# EAGLE board display (EAGLE 7.4.0)
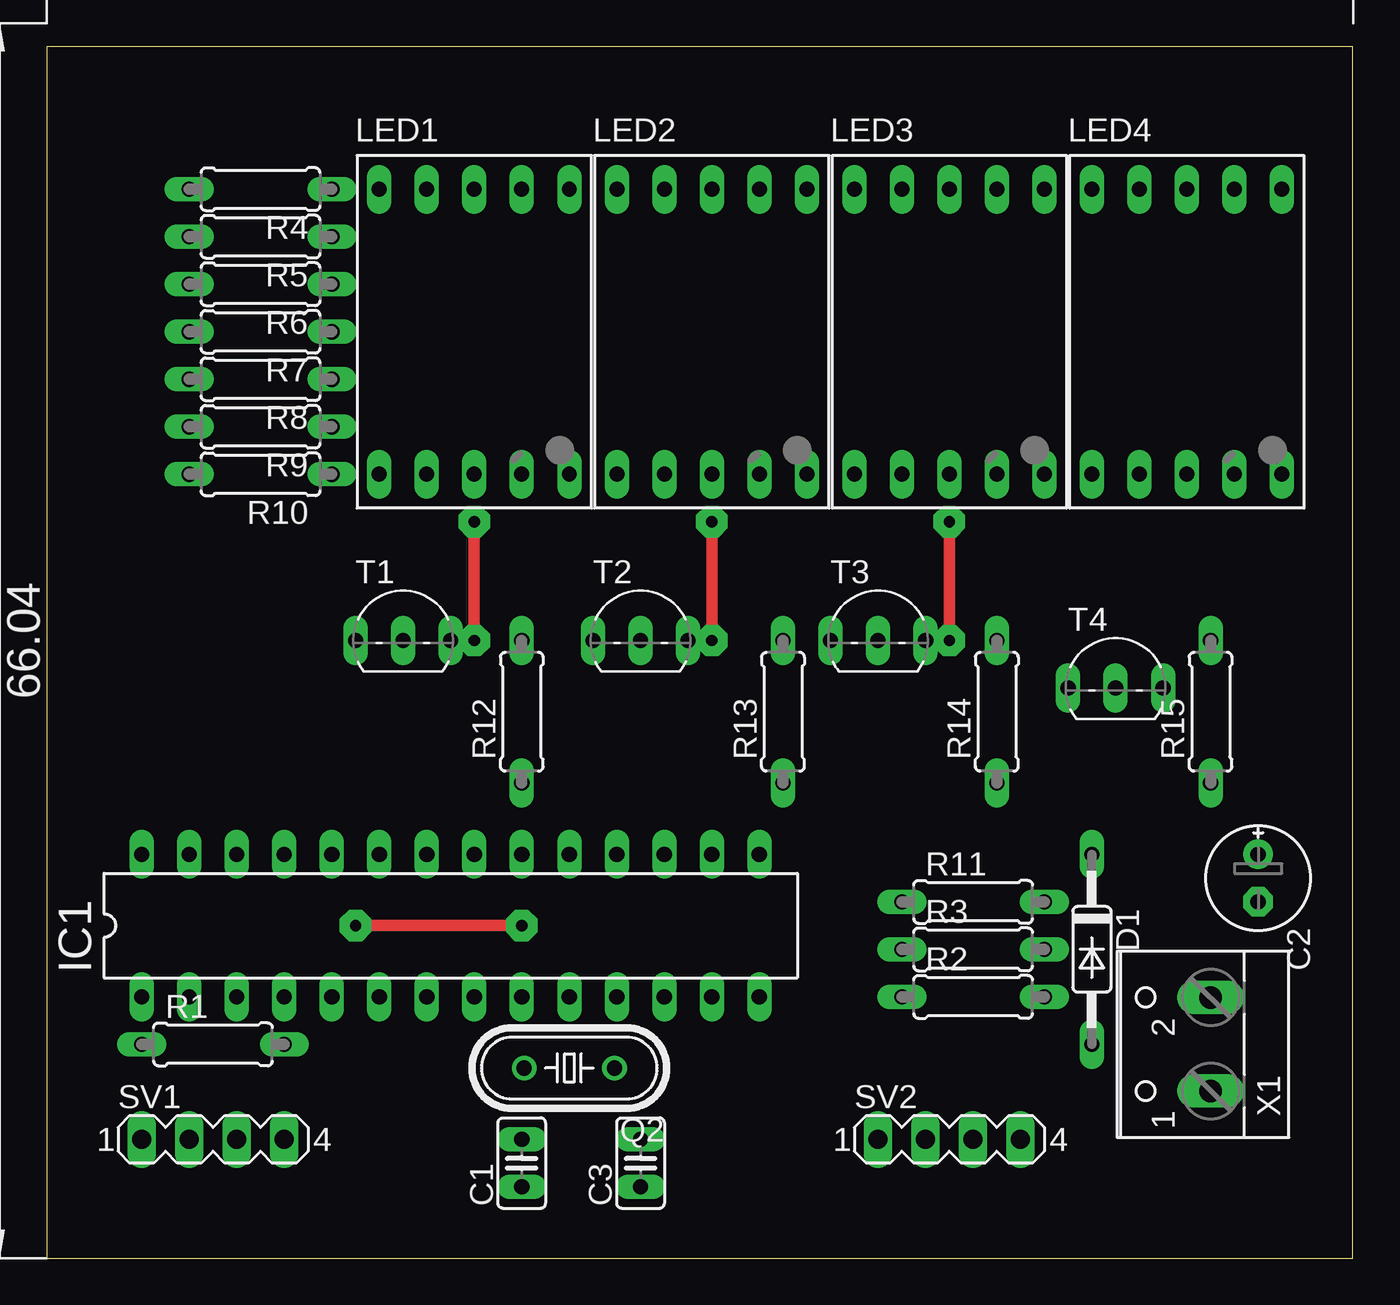
[diagram p0: board, top side]
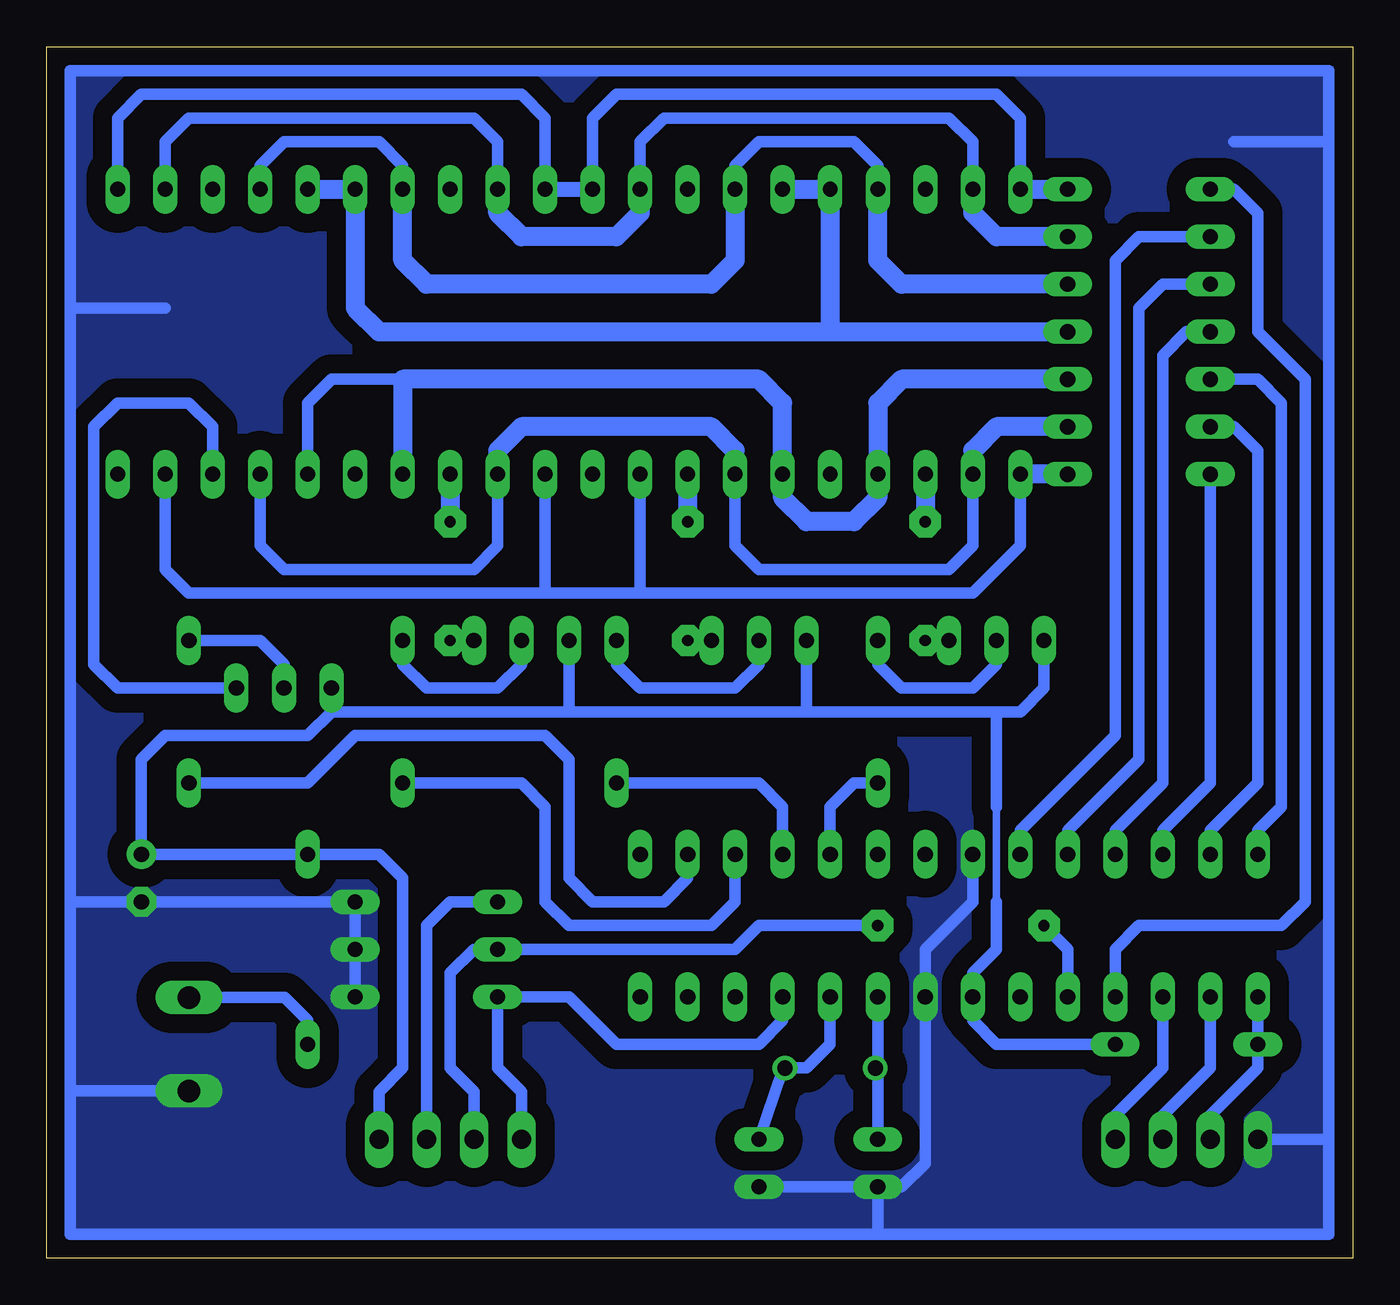
[diagram p1: board, bottom side, seen from below]

Size 69.83 x 64.77 mm. Coordinates in mm from the lower left corner, seen from the top.
Outline: 0,0 69.83,0 69.83,64.77 0,64.77 0,0
Copper layers (1*16): Top 0.035mm / dielectric 1.5mm / Bottom 0.035mm
Design rules "default": minimum track width 10mil, minimum drill 24mil, track to track 8mil, track to pad 8mil, pad to pad 8mil, via to via 8mil, smd to smd 8mil, copper to edge 40mil, drill to drill 8mil, minimum pad ring 10mil, minimum via ring 8mil, stop-mask expansion 4mil, vias tented up to drill 0mil, thermal gap 10mil

## Footprints (pad centres in the part's own frame; a part is rotated, then mirrored left to right if it is on the bottom)
C025-025X050 = drill 0.813 long: 1 -1.27,0; 2 1.27,0
E2,5-6E = drill 0.813 pad 1.575: + -1.27,0 | drill 0.813 pad 1.575 octagon: - 1.27,0
DO35-10 = drill 0.813 long: A 5.08,0; C -5.08,0
DIL28-3 = drill 0.813 long: 1 -16.51,-3.81; 2 -13.97,-3.81; 3 -11.43,-3.81; 4 -8.89,-3.81; 5 -6.35,-3.81; 6 -3.81,-3.81; 7 -1.27,-3.81; 8 1.27,-3.81; 9 3.81,-3.81; 10 6.35,-3.81; 11 8.89,-3.81; 12 11.43,-3.81; 13 13.97,-3.81; 14 16.51,-3.81; 15 16.51,3.81; 16 13.97,3.81; 17 11.43,3.81; 18 8.89,3.81; 19 6.35,3.81; 20 3.81,3.81; 21 1.27,3.81; 22 -1.27,3.81; 23 -3.81,3.81; 24 -6.35,3.81; 25 -8.89,3.81; 26 -11.43,3.81; 27 -13.97,3.81; 28 -16.51,3.81
SA56-11 = drill 0.8 long: 1 -5.08,-7.62; 2 -2.54,-7.62; 3 0,-7.62; 4 2.54,-7.62; 5 5.08,-7.62; 6 5.08,7.62; 7 2.54,7.62; 8 0,7.62; 9 -2.54,7.62; 10 -5.08,7.62
HC49/S = drill 0.813: 1 -2.413,0; 2 2.413,0
0207/7 = drill 0.813 long: 1 -3.81,0; 2 3.81,0
MA04-1 = drill 1.016 long: 1 -3.81,0; 2 -1.27,0; 3 1.27,0; 4 3.81,0
TO92-EBC = drill 0.813 long: B 0,-1.27; C 2.54,-1.27; E -2.54,-1.27
W237-102 = drill 1.194 long: 1 -2.5,-1.27; 2 2.5,-1.27

## Placement (x,y rotation side)
C1  33P  [C025-025X050]  25.4,5.08 90 top
C2  10U  [E2,5-6E]  64.77,20.32 270 top
C3  33P  [C025-025X050]  31.75,5.08 90 top
D1  1N4002  [DO35-10]  55.88,16.51 270 top
IC1  MEGA8-P  [DIL28-3]  21.59,17.78 0 top
LED1  7-SEG_SA56-11  [SA56-11]  22.86,49.53 0 top
LED2  7-SEG_SA56-11  [SA56-11]  35.56,49.53 0 top
LED3  7-SEG_SA56-11  [SA56-11]  48.26,49.53 0 top
LED4  7-SEG_SA56-11  [SA56-11]  60.96,49.53 0 top
Q2  [HC49/S]  27.94,10.16 180 top
R1  330  [0207/7]  8.89,11.43 0 top
R2  330  [0207/7]  49.53,13.97 0 top
R3  330  [0207/7]  49.53,16.51 0 top
R4  330  [0207/7]  11.43,57.15 180 top
R5  330  [0207/7]  11.43,54.61 180 top
R6  330  [0207/7]  11.43,52.07 180 top
R7  330  [0207/7]  11.43,49.53 180 top
R8  330  [0207/7]  11.43,46.99 180 top
R9  330  [0207/7]  11.43,44.45 180 top
R10  330  [0207/7]  11.43,41.91 180 top
R11  330  [0207/7]  49.53,19.05 0 top
R12  1k  [0207/7]  25.4,29.21 90 top
R13  1k  [0207/7]  39.37,29.21 90 top
R14  1k  [0207/7]  50.8,29.21 90 top
R15  1k  [0207/7]  62.23,29.21 90 top
SV1  [MA04-1]  8.89,6.35 0 top
SV2  [MA04-1]  48.26,6.35 0 top
T1  [TO92-EBC]  19.05,34.29 0 top
T2  [TO92-EBC]  31.75,34.29 0 top
T3  [TO92-EBC]  44.45,34.29 0 top
T4  [TO92-EBC]  57.15,31.75 0 top
X1  [W237-102]  60.96,11.43 90 top

## Library data of the parts
C1 C3 R1-R15 = rcl
C2 = resistor
D1 = diode
IC1 = atmel; OC_FARNELL: unknown; OC_NEWARK: unknown
LED1-LED4 = display-kingbright; OC_FARNELL: unknown; OC_NEWARK: unknown
Q2 = crystal; OC_FARNELL: 1667008; OC_NEWARK: unknown
SV1 SV2 = con-lstb; OC_FARNELL: unknown; OC_NEWARK: unknown
T1-T4 = transistor
X1 = con-wago-500; MPN: 237-102; OC_FARNELL: unknown; OC_NEWARK: 70K9898

## Nets
AVCC: IC1.20
GND: C1.1 C2.- C3.1 IC1.8 IC1.22 R2.2 R3.2 R11.2 SV1.1 X1.1
N$1: IC1.23 R5.2
N$2: LED1.7 LED2.9 LED3.7 LED4.9 R6.1
N$3: LED1.1 LED2.4 LED3.1 LED4.4 R10.1
N$4: LED1.2 LED2.2 LED3.2 LED4.2 R9.1
N$5: LED1.6 LED2.10 LED3.6 LED4.10 R7.1
N$6: LED1.3 T1.C
N$7: LED2.3 T2.C
N$8: LED1.4 LED2.1 LED3.4 LED4.1 R8.1
N$9: C1.2 IC1.9 Q2.2
N$10: C3.2 IC1.10 Q2.1
N$11: IC1.2 SV1.3
N$12: IC1.24 R6.2
N$13: IC1.1 R1.1 SV1.2
N$14: LED3.3 T3.C
N$15: LED4.3 T4.C
N$16: IC1.25 R7.2
N$17: IC1.26 R10.2
N$18: IC1.27 R9.2
N$19: IC1.28 R8.2
N$20: IC1.4 R4.2
N$21: IC1.3 SV1.4
N$22: IC1.5 R3.1 SV2.2
N$24: R12.2 T1.B
N$25: R13.2 T2.B
N$26: R14.2 T3.B
N$27: LED1.10 LED2.6 LED3.10 LED4.6 R4.1
N$28: R15.2 T4.B
N$29: IC1.19 R12.1
N$30: IC1.18 R13.1
N$31: IC1.17 R14.1
N$32: IC1.16 R15.1
N$33: IC1.11 R2.1 SV2.1
N$34: LED1.9 LED2.7 LED3.9 LED4.7 R5.1
N$35: R11.1 SV2.3
N$41: D1.A X1.2
VCC: C2.+ D1.C IC1.7 R1.2 SV2.4 T1.E T2.E T3.E T4.E

## Tracks (layer width: path | path; a pad name or v marks a point on that pad's centre or on a via)
GND
  Bottom 0.61: IC1.22 20.32,19.05 22.86,16.51 IC1.8 22.86,5.08 24.13,3.81 C1.1 | C1.1 C3.1 | C1.1 25.4,1.27 | 25.4,1.27 68.58,1.27 68.58,8.89 | 68.58,8.89 68.58,19.05 | 68.58,19.05 68.58,50.8 | 68.58,50.8 68.58,63.5 1.27,63.5 1.27,59.69 | 1.27,59.69 1.27,6.35 | 1.27,6.35 1.27,1.27 25.4,1.27 | 68.58,19.05 C2.- R11.2 R3.2 R2.2 | SV1.1 1.27,6.35 | X1.1 68.54,8.93 68.58,8.89 | 1.27,59.69 6.35,59.69 | 68.58,50.8 63.5,50.8
  pour Bottom (isolate 1.016, no thermals): 0,64.77 0,0 69.85,0 69.85,64.77
N$1
  Bottom 0.61: R5.2 11.43,54.61 12.7,53.34 12.7,27.94 17.78,22.86 IC1.23
N$2
  Bottom 0.61: LED4.9 58.42,58.42 57.15,59.69 52.07,59.69 50.8,58.42 LED3.7 | LED2.9 33.02,58.42 31.75,59.69 26.67,59.69 25.4,58.42 LED1.7
  Bottom 1.016: R6.1 24.13,52.07 25.4,53.34 LED1.7 | LED2.9 33.02,53.34 34.29,52.07 49.53,52.07 50.8,53.34 LED3.7
N$3
  Bottom 0.61: LED1.1 17.78,38.1 20.32,35.56 38.1,35.56 | 38.1,35.56 43.18,35.56 | 43.18,35.56 62.23,35.56 63.5,36.83 LED4.4 | LED3.1 43.18,35.56 | LED2.4 38.1,35.56
  Bottom 1.016: R10.1 LED1.1
N$4
  Bottom 0.61: LED3.2 45.72,38.1 46.99,36.83 57.15,36.83 58.42,38.1 LED4.2 | LED1.2 20.32,38.1 21.59,36.83 31.75,36.83 33.02,38.1 LED2.2
  Bottom 1.016: R9.1 19.05,44.45 20.32,43.18 LED1.2 | LED2.2 33.02,43.18 34.29,44.45 44.45,44.45 45.72,43.18 LED3.2
N$5
  Bottom 1.016: 27.94,49.53 LED1.6 LED2.10 | 27.94,49.53 R7.1 | LED4.10 LED3.6 53.34,50.8 52.07,49.53 27.94,49.53
N$6  (via drill 0.6 pad 1.68)
  Top 0.61: v22.86,33.02 v22.86,39.37
  Bottom 0.61: T1.C v22.86,33.02
  Bottom 1.016: LED1.3 v22.86,39.37
N$7  (via drill 0.6 pad 1.68)
  Top 0.61: v35.56,39.37 v35.56,33.02
  Bottom 0.61: v35.56,33.02 T2.C
  Bottom 1.016: LED2.3 v35.56,39.37
N$8
  Bottom 0.61: LED4.1 55.88,45.72 54.61,46.99 50.8,46.99
  Bottom 1.016: R8.1 24.13,46.99 25.4,45.72 LED1.4 25.4,40.64 26.67,39.37 29.21,39.37 30.48,40.64 LED2.1 30.48,45.72 31.75,46.99 50.8,46.99 LED3.4
N$9
  Bottom 0.61: IC1.9 25.4,10.29 Q2.2 25.4,10.03 C1.2
N$10
  Bottom 0.61: IC1.10 27.94,11.43 29.21,10.16 Q2.1 30.48,10.03 C3.2
N$11
  Bottom 0.61: SV1.3 10.16,7.62 7.62,10.16 IC1.2
N$12
  Bottom 0.61: R6.2 10.16,52.07 11.43,50.8 11.43,26.67 15.24,22.86 IC1.24
N$13
  Bottom 0.61: IC1.1 R1.1 5.08,10.16 6.35,8.89 7.62,7.62 SV1.2
N$14  (via drill 0.6 pad 1.68)
  Top 0.61: v48.26,33.02 v48.26,39.37
  Bottom 0.61: T3.C v48.26,33.02
  Bottom 1.016: LED3.3 v48.26,39.37
N$15
  Bottom 0.61: T4.C 66.04,30.48 67.31,31.75 67.31,44.45 66.04,45.72 62.23,45.72 60.96,44.45 LED4.3
N$16
  Bottom 0.61: IC1.25 12.7,22.86 10.16,25.4 10.16,48.26 8.89,49.53 R7.2
N$17
  Bottom 0.61: R10.2 7.62,25.4 10.16,22.86 IC1.26
N$18
  Bottom 0.61: IC1.27 7.62,22.86 5.08,25.4 5.08,43.18 6.35,44.45 R9.2
N$19
  Bottom 0.61: R8.2 5.08,46.99 3.81,45.72 3.81,24.13 5.08,22.86 IC1.28
N$20
  Bottom 0.61: R4.2 6.35,57.15 5.08,55.88 5.08,49.53 2.54,46.99 2.54,19.05 3.81,17.78 11.43,17.78 12.7,16.51 IC1.4
N$21
  Bottom 0.61: SV1.4 12.7,7.62 10.16,10.16 IC1.3
N$22  (via drill 0.6 pad 1.68)
  Top 0.61: v16.51,17.78 v25.4,17.78
  Bottom 0.61: IC1.5 15.24,16.51 v16.51,17.78 | v25.4,17.78 31.75,17.78 33.02,16.51 R3.1 46.99,16.51 48.26,15.24 48.26,10.16 46.99,8.89 SV2.2
N$24
  Bottom 0.61: T1.B 19.05,31.75 20.32,30.48 24.13,30.48 25.4,31.75 R12.2
N$25
  Bottom 0.61: R13.2 39.37,31.75 38.1,30.48 33.02,30.48 31.75,31.75 T2.B
N$26
  Bottom 0.61: R14.2 50.8,31.75 49.53,30.48 45.72,30.48 44.45,31.75 T3.B
N$27
  Bottom 0.61: LED4.6 66.04,60.96 64.77,62.23 44.45,62.23 43.18,60.96 LED3.10 | LED2.6 40.64,60.96 39.37,62.23 19.05,62.23 17.78,60.96 LED1.10
  Bottom 0.813: LED3.10 LED2.6
  Bottom 1.016: LED1.10 R4.1
N$28
  Bottom 0.61: R15.2 58.42,33.02 57.15,31.75 T4.B
N$29
  Bottom 0.61: R12.1 26.67,25.4 27.94,24.13 IC1.19
N$30
  Bottom 0.61: IC1.18 30.48,24.13 31.75,25.4 R13.1
N$31
  Bottom 0.61: IC1.17 33.02,19.05 34.29,17.78 41.91,17.78 43.18,19.05 43.18,24.13 44.45,25.4 R14.1
N$32
  Bottom 0.61: R15.1 55.88,25.4 53.34,27.94 43.18,27.94 41.91,26.67 41.91,20.32 40.64,19.05 36.83,19.05 35.56,20.32 IC1.16
N$33
  Bottom 0.61: SV2.1 44.45,8.89 45.72,10.16 R2.1 41.91,13.97 39.37,11.43 31.75,11.43 30.48,12.7 IC1.11
N$34
  Bottom 0.61: LED4.7 63.5,59.69 62.23,60.96 46.99,60.96 45.72,59.69 LED3.9 | LED1.9 20.32,59.69 21.59,60.96 36.83,60.96 38.1,59.69 LED2.7
  Bottom 1.016: R5.1 19.05,54.61 20.32,55.88 LED1.9 | LED2.7 38.1,55.88 39.37,54.61 44.45,54.61 45.72,55.88 LED3.9
N$35
  Bottom 0.61: R11.1 48.26,19.05 49.53,17.78 SV2.3
N$41
  Bottom 0.61: X1.2 57.11,13.93 55.88,12.7 D1.A
VCC
  Bottom 0.406: 19.05,19.05 19.05,24.13
  Bottom 0.61: T1.E 16.51,30.48 17.78,29.21 19.05,29.21 | 19.05,29.21 29.21,29.21 | 29.21,29.21 41.91,29.21 | 41.91,29.21 54.61,29.21 | T3.E 41.91,29.21 | T2.E 29.21,29.21 | 19.05,19.05 19.05,16.51 20.32,15.24 IC1.7 20.32,12.7 19.05,11.43 R1.2 | 19.05,24.13 19.05,29.21 | 54.61,29.21 55.88,27.94 63.5,27.94 64.77,26.67 C2.+ D1.C 52.07,21.59 50.8,20.32 50.8,10.16 52.07,8.89 SV2.4 | 54.61,29.21 T4.E